# Altium PCB PCB2_1.PcbDoc
Units mil, origin at the board's own origin, x right, y up, seen from the top; angles counter-clockwise.
Board outline 4040 x 3695 mil, 2 copper layers (Top Layer, Bottom Layer); 60 components, 0 nets, 240 pads, 2 vias.
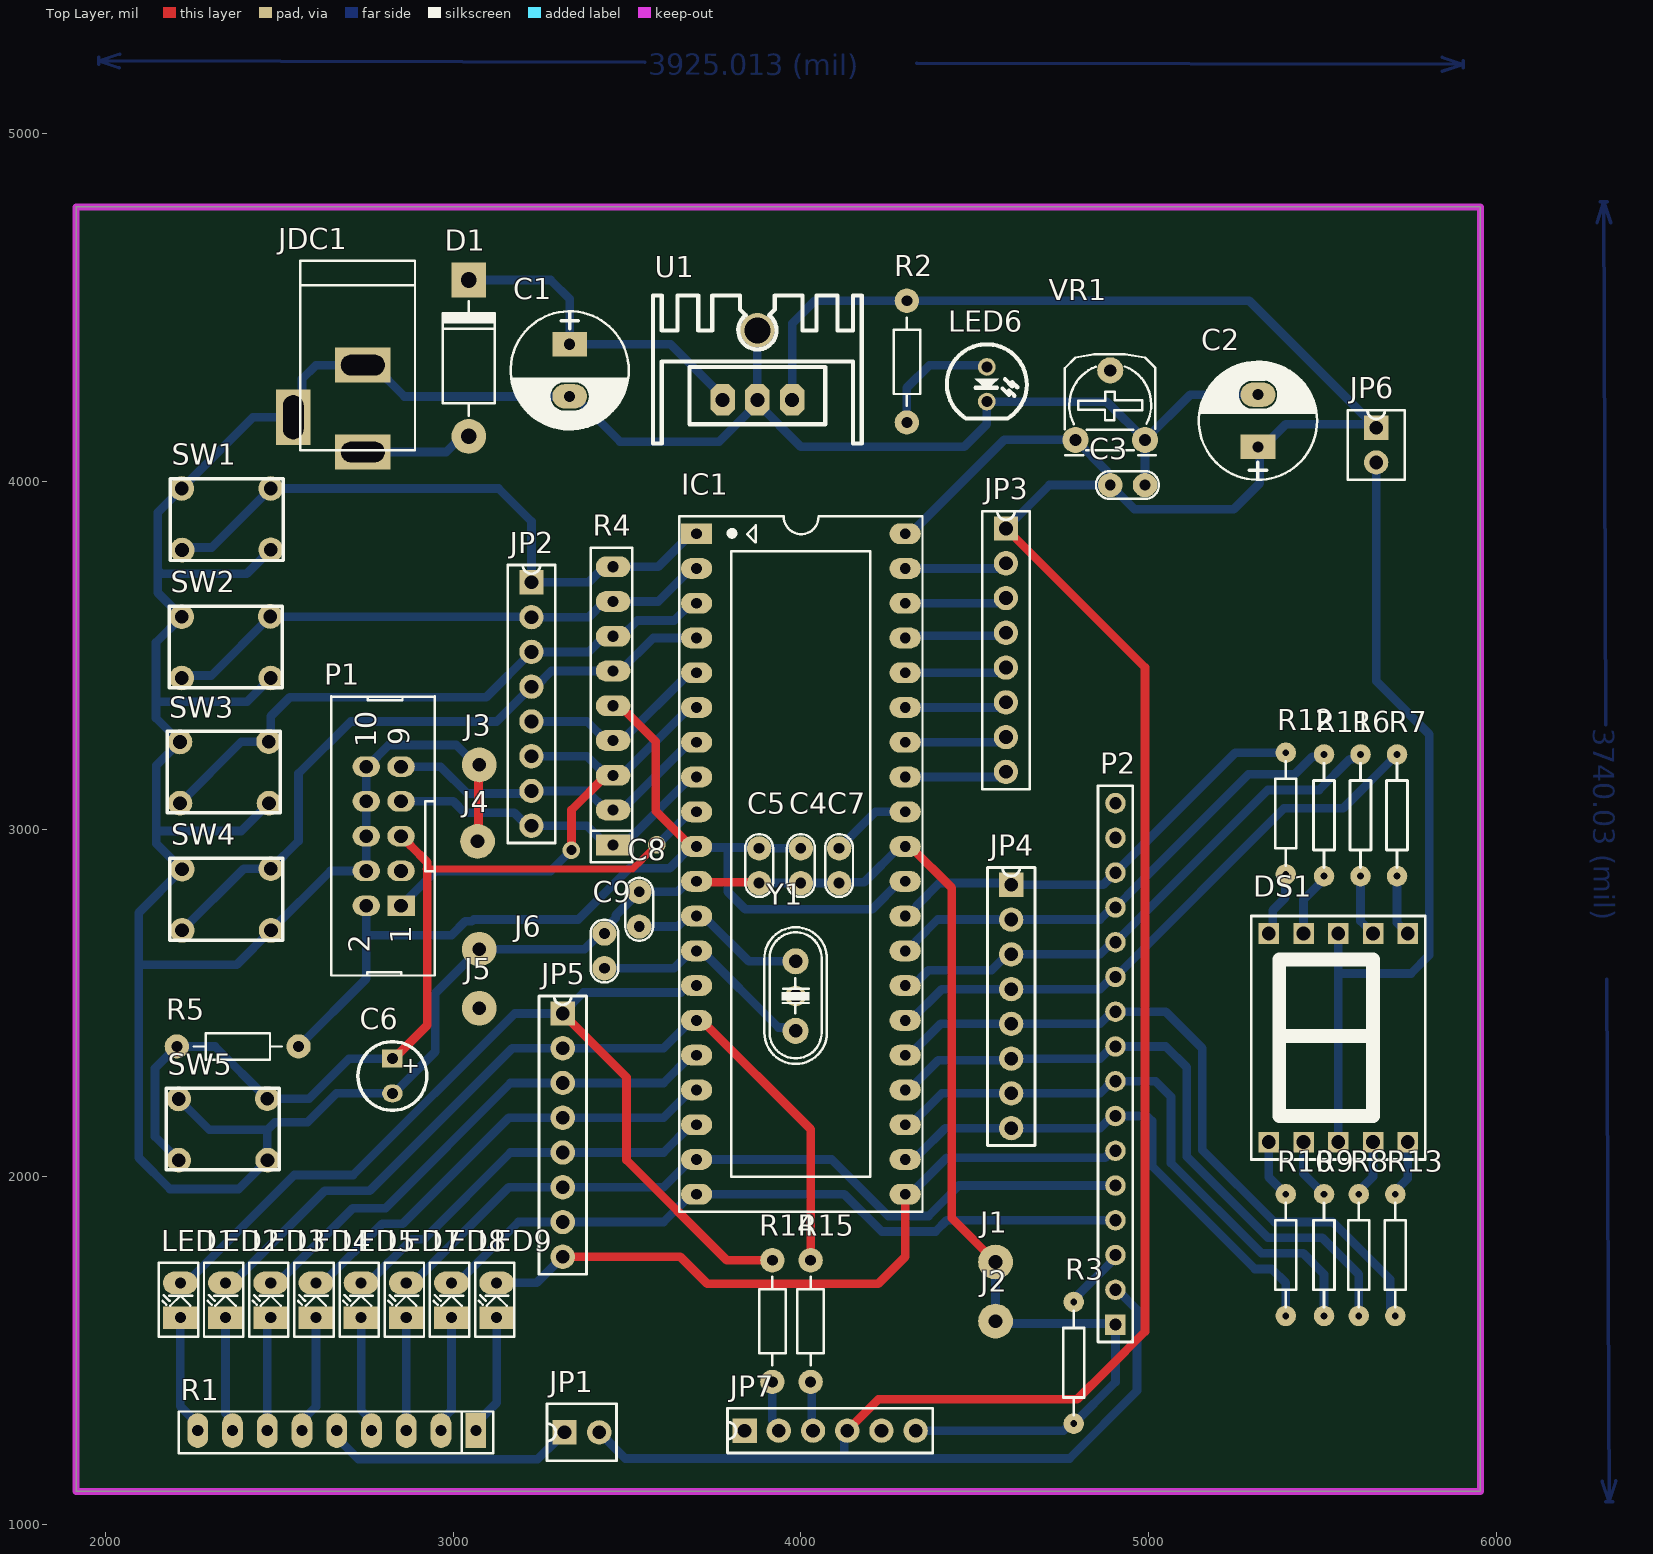
[diagram p0: Top Layer view]
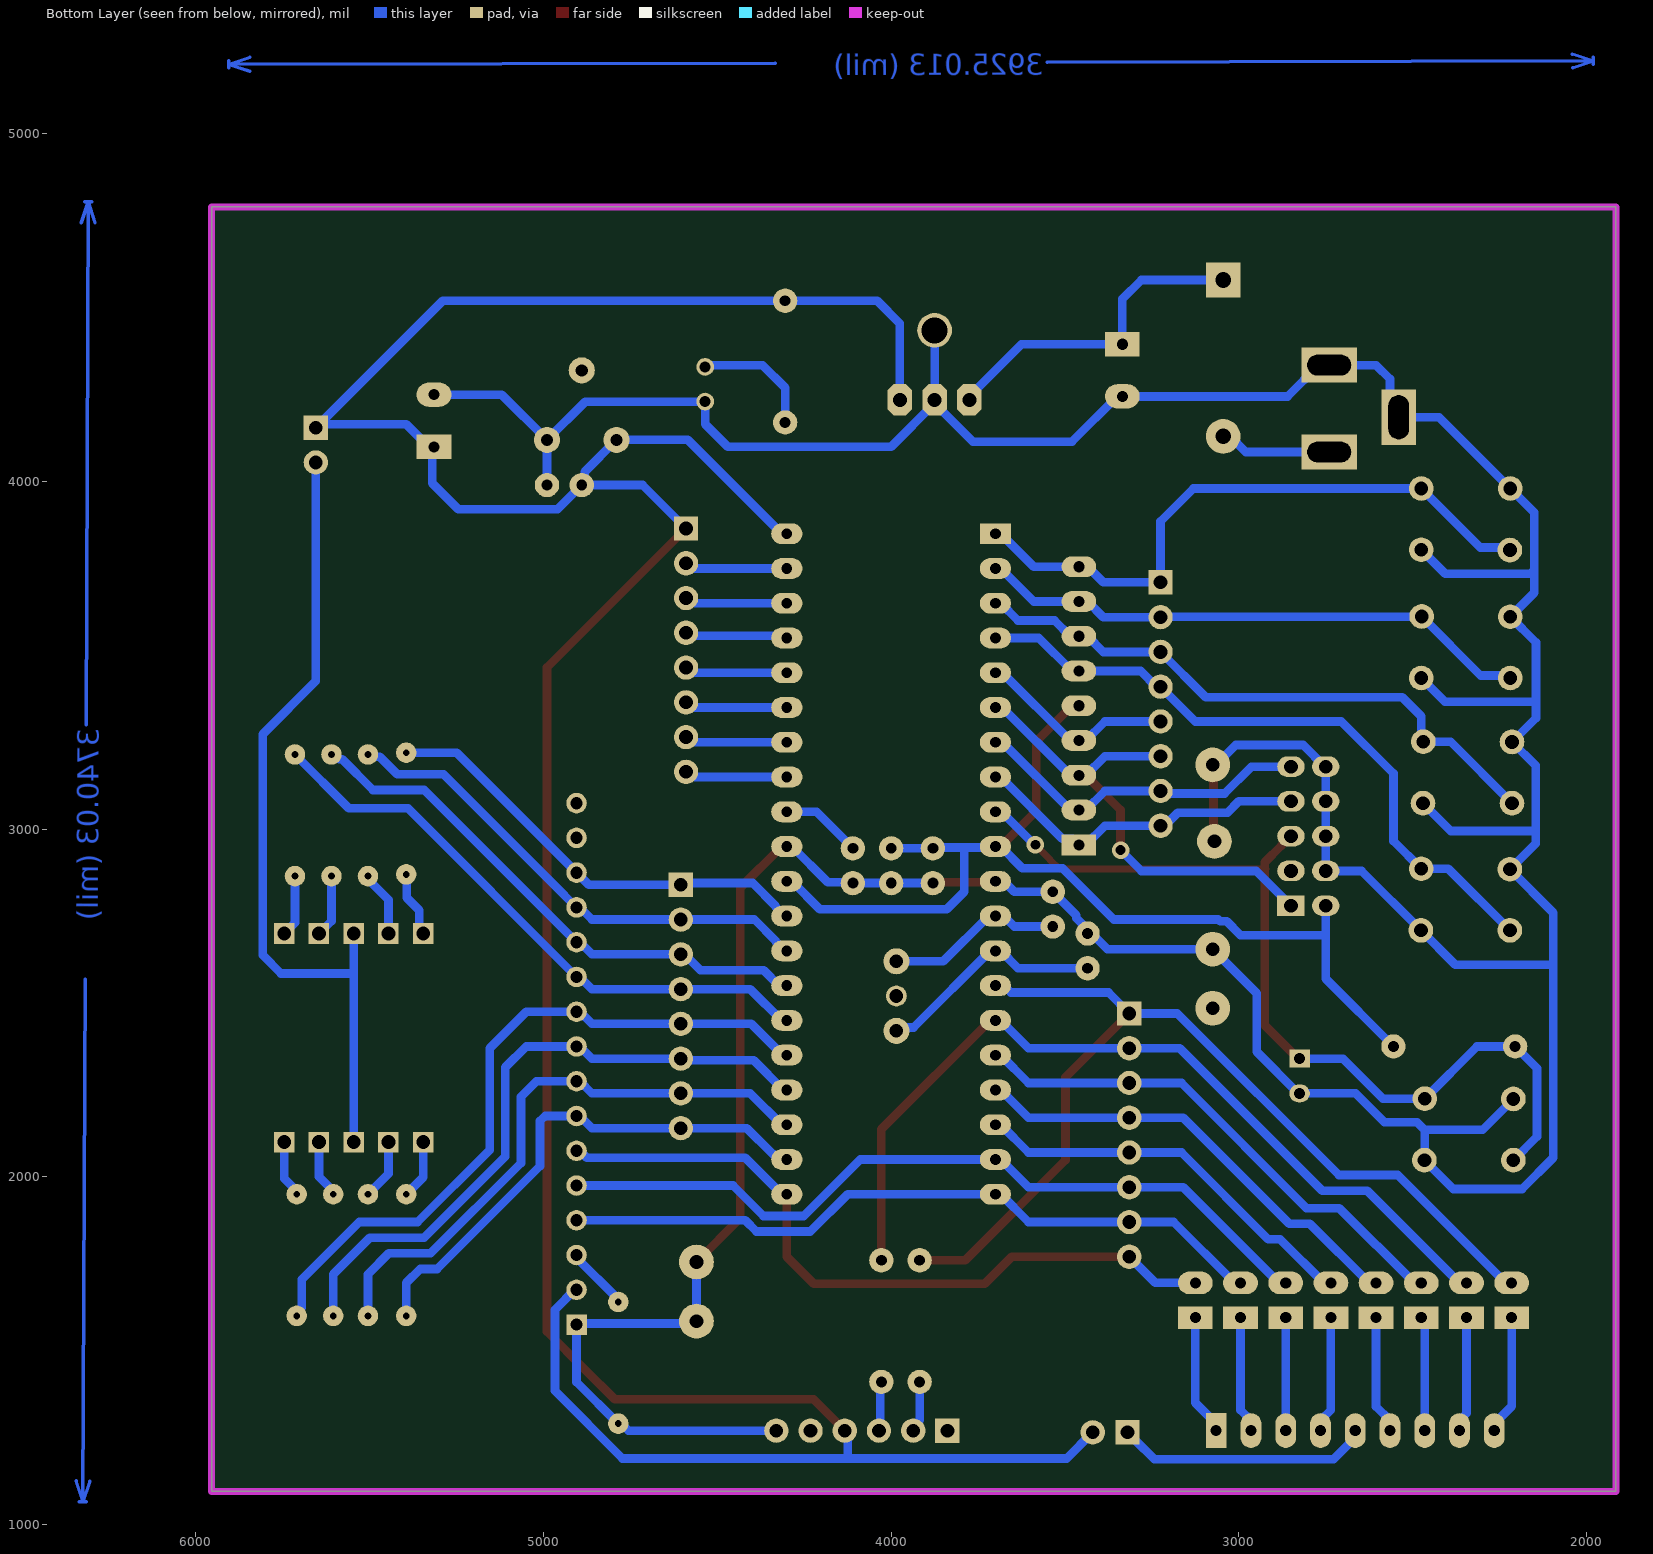
[diagram p1: Bottom Layer view, seen from below]

## Layer stack, top to bottom
Top Solder: solder mask 0.4, Solder Resist, Dk 3.5
Top Layer: signal copper 1.4
Dielectric 1: dielectric 12.6, FR-4, Dk 4.8
Bottom Layer: signal copper 1.4
Bottom Solder: solder mask 0.4, Solder Resist, Dk 3.5

## Board outline
1915,1095 5955,1095 5955,4790 1915,4790

## Design rules (kind name [scope] priority, off if disabled: settings)
Clearance [All] p1: gap=10 ignorepadtopadclearanceinfootprint=FALSE except(0: Arc-Hole Track-Hole SMDPad-Hole THPad-Hole Via-Hole Fill-Hole Poly-Hole Region-Hole Text-Hole)
PolygonConnect [All] p1: connectstyle=Relief reliefconductorwidth=10 reliefentries=4 polygonreliefangle="90 Angle" airgapwidth=10
RoutingVias [All] p1: holewidth=28 width=50 viastyle="Through Hole" minholewidth=28 minwidth=50 maxholewidth=28 maxwidth=50
SolderMaskExpansion [All] p1: expansion=4 istentingtop=FALSE
Width [All] p1: maxlimit=10 minlimit=10 preferedwidth=10
30 further rules are at their usual default settings.

## Components (designator, comment, footprint, x,y, rotation, side; value= is the part's Value field where it differs from the comment)
C1 "1000uF/16V" CP1.5/3.4 3335,4395 r270 top
C2 "1000uF/16V" CP1.5/3.4 5315,4100 r90 top
C3 "100pF" CN1 4990,3990 r180 top
C4 "100nF" CN1 4000,2845 r90 top value=100pF
C5 "100nF" CN1 3880,2845 r90 top value=100pF
C6 "10uF" C5mm 2825,2290 r270 top
C7 "100nF" CN1 4110,2845 r90 top value=100pF
C8 "22pF" CN1 3535,2820 r270 top value=100pF
C9 "22pF" CN1 3435,2700 r270 top value=100pF
D1 "1N4007" D2A 3045,4580 r270 top
DS1 "7SEG-A" LED7SEG 5545,2400 r0 top
IC1 "ATMEL 16L" DIP40/W0.6 3700,3850 r270 top value="Atmega 16L"
J1 "Hole" JP1 4560,1755 r90 top
J2 "Hole" JP1 4560,1585 r90 top
J3 "Hole" JP1 3075,3185 r90 top
J4 "Hole" JP1 3070,2965 r90 top
J5 "Hunget" JP1 3075,2485 r270 top
J6 "Heatsink Hole" JP1 3075,2655 r270 top
JDC1 "Jac DC" DC-IN 2640,4210 r270 top
JP1 "JP2" CON2 3320,1265 r90 top value="Connector 2"
JP2 "JP8" CON8 3225,3710 r0 top value="Connector 8"
JP3 "JP8" CON8 4590,3865 r0 top value="Connector 8"
JP4 "JP8" CON8 4605,2840 r0 top value="Connector 8"
JP5 "JP8" CON8 3315,2470 r0 top value="Connector 8"
JP6 "JP2" CON2 5655,4155 r0 top value="Connector 2"
JP7 "JP6" CON6 3838.15,1270 r90 top value="Connector 6"
LED1 "LED" LED-V 2215,1595 r90 top value="LED 3 ly Single Colour"
LED2 "LED" LED-V 2345,1595 r90 top value="LED 3 ly Single Colour"
LED3 "LED" LED-V 2475,1595 r90 top value="LED 3 ly Single Colour"
LED4 "LED" LED-V 2605,1595 r90 top value="LED 3 ly Single Colour"
LED5 "LED" LED-V 2735,1595 r90 top value="LED 3 ly Single Colour"
LED6 "LED_G_5" LED5G 4535,4330 r270 top value=Green
LED7 "LED" LED-V 2865,1595 r90 top value="LED 3 ly Single Colour"
LED8 "LED" LED-V 2995,1595 r90 top value="LED 3 ly Single Colour"
LED9 "LED" LED-V 3125,1595 r90 top value="LED 3 ly Single Colour"
P1 "SPI" IDE_2X5 2850,2780 r90 top value="Header 5x2"
P2 "Header 16" HDR1X16 4905,1575 r90 top
R1 "1K" RN8 3065,1270 r180 top value=10K
R2 "1k" R1/4W 4305,4520 r270 top value="R1/4W - 1K"
R3 "1k" R1/6W 4785,1465 r90 top value="R1/4W - 1K"
R4 "10K" RN8 3460,2955 r90 top
R5 "10k" R1/4W 2205,2375 r0 top value="R1/4W - 1K"
R6 "1k" R1/6W 5610,3040 r270 top value="R1/4W - 1K"
R7 "1k" R1/6W 5715,3040 r270 top value="R1/4W - 1K"
R8 "1k" R1/6W 5605,1775 r90 top value="R1/4W - 1K"
R9 "1k" R1/6W 5505,1775 r90 top value="R1/4W - 1K"
R10 "1k" R1/6W 5395,1775 r90 top value="R1/4W - 1K"
R11 "1k" R1/6W 5505,3040 r270 top value="R1/4W - 1K"
R12 "1k" R1/6W 5395,3045 r270 top value="R1/4W - 1K"
R13 "1k" R1/6W 5710,1775 r90 top value="R1/4W - 1K"
R14 "100R" R1/4W 3918.15,1760 r270 top value="R1/4W - 1K"
R15 "100R" R1/4W 4028.15,1760 r270 top value="R1/4W - 1K"
SW1 "SW" SW-4P-S 2475,3804 r180 top value="Button chip 4 pin"
SW2 "SW" SW-4P-S 2219,3611 r0 top value="Button chip 4 pin"
SW3 "SW" SW-4P-S 2214,3251 r0 top value="Button chip 4 pin"
SW4 "SW" SW-4P-S 2220,2885 r0 top value="Button chip 4 pin"
SW5 "SW" SW-4P-S 2210,2224 r0 top value="Button chip 4 pin"
U1 "LM7805" QTO-220H3 3775,4235 r0 top
VR1 "10K" VR 4790,4120 r0 top value="VR 10K"
Y1 "8MHz" XT2 3985,2520 r270 top

## Footprints (in the part's own frame and the unit in brackets; to place one, negate y for a bottom-side part, rotate by r counter-clockwise, add the part's x,y. Pads: shape width x height; smd on the part's side, far side on the other; paste and mask are expansions set on the pad)
C5mm [mm]
  rect 1.3x1.5 hole 0.8: 1(-1.27,0)
  oval 1.3x1.5 hole 0.8: 2(1.27,0)
  silkscreen extent -2.51,-2.51 2.51,2.51, body extent -2.5,-2.5 2.49,2.5, height 11.01
CN1 [mil]
  round 70 hole 31: 1(0,0) 2(100,0)
  silkscreen extent -40,-40 141,40, body extent -60,-30 170,37, height 265
CON2 [mil]
  rect 70x70 hole 39.37 unplated: 1(0,0)
  round 70 hole 39.37 unplated: 2(0,-100)
  silkscreen extent -82,-150 82,50
CON6 [mil]
  rect 70x70 hole 39.37 unplated: 1(0,0)
  round 70 hole 39.37 unplated: 2(0,-98.43) 3(0,-196.85) 4(0,-295.28) 5(0,-393.7) 6(0,-492.13)
  silkscreen extent -64,-541 64,49
CON8 [mil]
  rect 70x70 hole 39.37 unplated: 1(0,0)
  round 70 hole 39.37 unplated: 2(0,-100) 3(0,-200) 4(0,-300) 5(0,-400) 6(0,-500) 7(0,-600) 8(0,-700)
  silkscreen extent -68,-750 68,50
CP1.5/3.4 [mil] "Tu hoa 220->470uF,16V, 470uF/16V,25V"
  rect 70x100 hole 32: 1(0,0)
  oval 70x100 hole 32: 2(150,0)
  silkscreen extent -95,-170 245,170, body extent -85,-157 230,157, height 446
D2A [mil] "Diode 2A, W 150mil, L 450mil"
  round 100 hole 45: 1(450,0)
  rect 100x100 hole 45: 2(0,0)
  silkscreen extent 61,-75 391,75, body extent 5,-47 435,54, height 100
DC-IN [mil] "Jac DC input"
  rect 100x160 hole 59.06 slot 125.98 at 90 deg: 1(125,100) 2(-125,100)
  rect 160x100 hole 59.06 slot 125.98 at 0 deg: 3(25,-100)
  silkscreen extent -425,-80 120,250, body extent -410,-105 134,269, height 434
DIP40/W0.6 [mil] "40 PIN, W 600mil, Pin to pin 100mil"
  rect 60x90 hole 31: 1(0,0)
  oval 60x90 hole 31: 2(100,0) 3(200,0) 4(300,0) 5(400,0) 6(500,0) 7(600,0) 8(700,0) 9(800,0) 10(900,0) 11(1000,0) 12(1100,0) 13(1200,0) 14(1300,0) 15(1400,0) 16(1500,0) 17(1600,0) 18(1700,0) 19(1800,0) 20(1900,0) 21(1900,600) 22(1800,600) 23(1700,600) 24(1600,600) 25(1500,600) 26(1400,600) 27(1300,600) 28(1200,600) 29(1100,600) 30(1000,600) 31(900,600) 32(800,600) 33(700,600) 34(600,600) 35(500,600) 36(400,600) 37(300,600) 38(200,600) 39(100,600) 40(0,600)
  silkscreen extent -50,-50 1950,650, body extent -82,-10 1982,600, height 224
HDR1X16 [mm] "Connector; Header; 16 Position"
  rect 1.5x1.5 hole 0.9: 1(0,0)
  round 1.5 hole 0.9: 2(2.54,0) 3(5.08,0) 4(7.62,0) 5(10.16,0) 6(12.7,0) 7(15.24,0) 8(17.78,0) 9(20.32,0) 10(22.86,0) 11(25.4,0) 12(27.94,0) 13(30.48,0) 14(33.02,0) 15(35.56,0) 16(38.1,0)
  silkscreen extent -1.27,-1.27 39.37,1.27, body extent -1.27,-1.27 39.37,1.27, height 7
IDE_2X5 [mm] "Header 10x2,20 pin, connecter"
  rect 1.5x2 hole 1: 1(0,0)
  oval 1.5x2 hole 1: 2(0,2.54) 3(2.54,0) 4(2.54,2.54) 5(5.08,0) 6(5.08,2.54) 7(7.62,0) 8(7.62,2.54) 9(10.16,0) 10(10.16,2.54)
  silkscreen extent -5.1,-2.47 15.29,5.11, body extent -5.07,-2.98 15.23,5.87, height 9.17
JP1 [mm]
  round 2.54 hole 1: 1(0,0)
LED5G [mm] "LED, GREEN, 2 LEAD, 5mm"
  round 1.3 hole 0.8: 1(0,0) 2(2.54,0)
  silkscreen extent -1.65,-2.92 3.77,2.92, body extent -1.71,-3.01 3.71,3.01, height 12.31
LED7SEG [mm] "LED7SEG"
  round 1.524 on Top Overlay: 0(4.724,-5.334)
  rect 1.5x1.5 hole 1: 1(-5.055,-7.62) 2(-2.515,-7.62) 3(0.025,-7.62) 4(2.565,-7.62) 5(5.105,-7.62) 6(5.105,7.62) 7(2.565,7.62) 8(0.025,7.62) 9(-2.515,7.62) 10(-5.055,7.62)
  silkscreen extent -6.32,-8.89 6.38,8.89, body extent -6.35,-9.52 6.35,9.53, height 8.03
LED-V [mil] "LED 2 PIN, Rectang Only colour"
  rect 65x100 hole 32: 1(0,0)
  oval 65x100 hole 32: 2(100,0)
  silkscreen extent -55,-51 158,62
QTO-220H3 [mil] "TO-220 1-2-3"
  oct 70x90 hole 40: 1(0,0) 2(100,0) 3(200,0)
  round 100 hole 75: 2(100,200)
  silkscreen extent -200,-125 400,300, body extent -194,-102 388,323, height 984
R1/4W [mil] "R 1/4W, 2 Pin, 350mil"
  round 70 hole 31: 1(0,0) 2(350,0)
  silkscreen extent 48,-38 302,38, body extent -40,-47 386,47, height 111
R1/6W [mm]
  round 1.5 hole 0.5: 1(-4.445,0) 2(4.445,0)
  silkscreen extent -3.81,-0.76 3.81,0.76
RN8 [mil] "R SIP8, 9 Pin"
  rect 60x100 hole 32: 1(0,0)
  oval 60x100 hole 32: 2(100,0) 3(200,0) 4(300,0) 5(400,0) 6(500,0) 7(600,0) 8(700,0) 9(800,0)
  silkscreen extent -50,-55 855,65, body extent -43,-44 843,5, height 259
SW-4P-S [mm]
  round 1.8 hole 1: 1(0,0) 2(0,-4.47) 3(6.502,-4.47) 4(6.477,0.025)
  silkscreen extent -0.91,-5.18 7.34,0.79, body extent -0.86,-5.23 7.35,0.76, height 9.52
VR [mil] "Resistor Variable"
  round 75 hole 35: 1(0,0) 2(100,200) 3(200,0)
  silkscreen extent -31,-44 231,246, body extent -87,-30 307,372, height 165
XT2 [mm] "Footpin for Crystal 2 pin"
  round 1.524 hole 1: 0(0,0)
  round 1.905 hole 1: 1(-2.54,0) 2(2.54,0)
  silkscreen extent -5.03,-2.29 4.96,2.29, body extent -5.93,-2.36 5.42,2.29, height 3.5

## Part data
C1 C2: library part CP4, "Cap 1000uF/16V - 220uF/50V", Description 1="2200uF-3300uF/6,3V - 1000uF-2200uF/10V", Description 2="1000uF/16V - 470uF => 1000uF/25V - 100uF/100V", Description 3=330uF>470uF/35V_220uF>470uF/50V_10uF>22uF/250V, Description 4="220uF => 330uF/63V - 10uF =>33uF/160 - 200V", Description 5="4,7uF>10uF/250V_3,3uF>10uF/400V - 2,2uF>4,7uF/450V"
C3 C4 C5 C7 C8 C9: library part CN1, "Cap np  1pF - 472pF"
C6: library part "Cap Pol 5mm", "Polarized Capacitor (Axial)", LatestRevisionDate=17-Jul-2002, LatestRevisionNote="Re-released for DXP Platform.", PackageReference=POLAR0.8, Published=8-Jun-2000, Publisher="Altium Limited"
D1: library part D1A, "Diode 1A"
DS1: library part LED7SEG-A, "14.2 mm General Purpose Blue 7-Segment Display: CA, RH DP, Gray Surface", Colour=Blue, PackageDocument=24-Sep-2002, ComponentLink1Description="Manufacturer Link", ComponentLink1URL=http://www.agilent.com/, DatasheetDocument=24-Sep-2002, LatestRevisionDate=17-Dec-2003, LatestRevisionNote="Schematic revised, PCB Footprint replaced.", MinimumIntensity="2020 ucd", Note="IF = 10 mA", PackageReference=H, Published=8-Jun-2000, Publisher="Altium Limited"
IC1: library part Atmega16L, "8-Bit AVR Microcontroller with 16K Bytes of In-System Programmable Flash Memory"
J1 J2 J3 J4 J5 J6: library part JP1, "JP1"
JDC1: library part DCIN, "Jac DC input"
JP1 JP6: library part Con2, "Connector 2"
JP2 JP3 JP4 JP5: library part Con8, "Connector 8"
JP7: library part Con6, "Connector 6"
LED1 LED2 LED3 LED4 LED5 LED7 LED8 LED9: "LED Single colour Green and Red"
LED6: library part LED_GREEN_5MM, "LED Green 5mm", ComponentLink1Description=Datasheet, ComponentLink1URL="D:\Dropbox\Datasheets\Opto and Illumination\LEDs\SMD LED.pdf", Unit Price=0.0476
P1: library part "IDE 5x2", "Header 5x2"
P2: "Header, 16-Pin", LatestRevisionDate=17-Jul-2002, LatestRevisionNote="Re-released for DXP Platform.", Publisher="Altium Limited"
R1 R4: library part RKC8LD, "Resistor Pack 4x2"
R2 R5 R14 R15: library part R1/4W, "Resistor 1/4W"
R3 R6 R7 R8 R9 R10 R11 R12 R13: library part Res, "Resistor 1/4W"
SW1 SW2 SW3 SW4 SW5: library part SW4, "Switch button 4 pin"
U1: "TO-220", Text Field1=70, Text Field2=30
VR1: library part VR1, "Var Resistor"
Y1: library part Crystal, "Crystal Oscillator", LatestRevisionDate=17-Jul-2002, LatestRevisionNote="Re-released for DXP Platform.", PackageReference=R38, Published=8-Jun-2000, Publisher="Altium Limited"

## Via types
v1: diameter 50, hole 28, Top Layer to Bottom Layer, 2 vias

## Nets (pads, with @x,y where several pads share a name; then routed paths per layer and width w, separated by ;. In a path a pad name is that pad's centre, name@x,y a point inside that pad or via, vN(x,y) a via of type N, cw(c..) or ccw(c..) an arc to the next point about the centre after c; other vN are vias at no path point)
pads on no net: C1.1 C1.2 C2.1 C2.2 C3.1 C3.2 C4.1 C4.2 C5.1 C5.2 C6.1 C6.2 C7.1 C7.2 C8.1 C8.2 C9.1 C9.2 D1.1 D1.2 DS1.0 DS1.1 DS1.2 DS1.3 DS1.4 DS1.5 DS1.6 DS1.7 DS1.8 DS1.9 DS1.10 IC1.1 IC1.2 IC1.3 IC1.4 IC1.5 IC1.6 IC1.7 IC1.8 IC1.9 IC1.10 IC1.11 IC1.12 IC1.13 IC1.14 IC1.15 IC1.16 IC1.17 IC1.18 IC1.19 IC1.20 IC1.21 IC1.22 IC1.23 IC1.24 IC1.25 IC1.26 IC1.27 IC1.28 IC1.29 IC1.30 IC1.31 IC1.32 IC1.33 IC1.34 IC1.35 IC1.36 IC1.37 IC1.38 IC1.39 IC1.40 J1.1 J2.1 J3.1 J4.1 J5.1 J6.1 JDC1.1 JDC1.2 JDC1.3 JP1.1 JP1.2 JP2.1 JP2.2 JP2.3 JP2.4 JP2.5 JP2.6 JP2.7 JP2.8 JP3.1 JP3.2 JP3.3 JP3.4 JP3.5 JP3.6 JP3.7 JP3.8 JP4.1 JP4.2 JP4.3 JP4.4 JP4.5 JP4.6 JP4.7 JP4.8 JP5.1 JP5.2 JP5.3 JP5.4 JP5.5 JP5.6 JP5.7 JP5.8 JP6.1 JP6.2 JP7.1 JP7.2 JP7.3 JP7.4 JP7.5 JP7.6 LED1.1 LED1.2 LED2.1 LED2.2 LED3.1 LED3.2 LED4.1 LED4.2 LED5.1 LED5.2 LED6.1 LED6.2 LED7.1 LED7.2 LED8.1 LED8.2 LED9.1 LED9.2 P1.1 P1.2 P1.3 P1.4 P1.5 P1.6 P1.7 P1.8 P1.9 P1.10 P2.1 P2.2 P2.3 P2.4 P2.5 P2.6 P2.7 P2.8 P2.9 P2.10 P2.11 P2.12 P2.13 P2.14 P2.15 P2.16 R1.1 R1.2 R1.3 R1.4 R1.5 R1.6 R1.7 R1.8 R1.9 R2.1 R2.2 R3.1 R3.2 R4.1 R4.2 R4.3 R4.4 R4.5 R4.6 R4.7 R4.8 R4.9 R5.1 R5.2 R6.1 R6.2 R7.1 R7.2 R8.1 R8.2 R9.1 R9.2 R10.1 R10.2 R11.1 R11.2 R12.1 R12.2 R13.1 R13.2 R14.1 R14.2 R15.1 R15.2 SW1.1 SW1.2 SW1.3 SW1.4 SW2.1 SW2.2 SW2.3 SW2.4 SW3.1 SW3.2 SW3.3 SW3.4 SW4.1 SW4.2 SW4.3 SW4.4 SW5.1 SW5.2 SW5.3 SW5.4 U1.1 U1.2 U1.3 VR1.1 VR1.2 VR1.3 Y1.0 Y1.1 Y1.2
copper on no net: | length 89729.3
  Top Layer w20: 2921.87,2885 3515.96,2885 3542.5,2911.54 3542.5,2912.5 v1(3585,2955)
  Top Layer w25: 2825,2340 2828.94,2340 2925,2436.06 2925,2905 2876.87,2953.13 2876.87,2953.76 2850.63,2980 2850,2980 ; 3070,2965 3072.5,2967.5 3072.5,3182.5 3075,3185 ; 3315,1770 3652.89,1770 3730.39,1692.5 4222.5,1692.5 4300,1770 4300,1950 ; 3315,2470 3498.31,2286.69 3498.31,2048.31 3786.61,1760 3918.15,1760 ; v1(3340,2940) 3340,3055 3440,3155 3460,3155 ; 3460,3355 3480,3355 3582.5,3252.5 3582.5,3052.5 3685,2950 3700,2950 ; 3700,2450 3715,2450 4028.15,2136.85 4028.15,1760 ; 3700,2850 3702.5,2847.5 3877.5,2847.5 3880,2845 ; 4133.43,1270 4223.43,1360 4795,1360 4881.01,1446.01 4990,1554.98 4990,3465 4590,3865 ; 4300,2950 4315,2950 4433.67,2831.33 4433.67,1881.33 4560,1755
  Bottom Layer w10: 1979.97,5200 1980.03,5220 ; 2039.95,5189.85 1980,5210 ; 2040.05,5229.85 1980,5210 ; 3551.62,5206 1980,5210 ; 4333.38,5204 5905,5200 ; 5844.95,5180.15 5905,5200 ; 5845.05,5220.15 5905,5200 ; 5904.97,5190 5905.03,5210 ; 6290.24,4744.92 6310,4805 ; 6300,4804.96 6320,4805.04 ; 6304.76,1124.92 6325,1065 ; 6315,1064.96 6335,1065.04 ; 6316.03,3300.88 6310,4805 ; 6318.97,2569.12 6325,1065 ; 6330.24,4745.08 6310,4805 ; 6344.76,1125.08 6325,1065
  Bottom Layer w25: 2210,2048 2142.07,2115.93 2142.07,2312.07 2205,2375 2315,2375 2465,2225 2585.19,2225 2700.19,2340 2825,2340 ; 2210,2224 2299,2135 2465,2135 ; 2214,3075 2391,3252 2469,3252 2474.93,3257.93 2474.93,3324.93 2530,3380 3095,3380 3225,3510 3389.54,3510 3434.54,3555 3485.19,3555 3530.33,3600.13 3635.13,3600.13 3685,3650 3700,3650 ; 2215,1595 2215,1340 2265,1290 2265,1270 ; 2215,1695 2232.5,1695 2542.5,2005 2711.67,2005 3176.67,2470 3315,2470 3375,2530 3655.53,2530 3675.53,2550 3700,2550 ; 2219,3435 2226.34,3442.34 2304.34,3442.34 2474,3612 2475,3611 3224,3611 3225,3610 3389.54,3610 3434.54,3655 3460,3655 3590,3655 3685,3750 3700,3750 ; 2220,2709 2397,2886 2475,2886 2555,2966 2555,3160 2705,3310 3125,3310 3225,3410 3237.18,3410 3282.18,3455 3460,3455 3480,3455 3575,3550 3700,3550 ; 2220,3803 2227.34,3810.34 2305.34,3810.34 2475,3980 3130,3980 3225,3885 3225,3710 3389.54,3710 3434.54,3755 3460,3755 3590,3755 3685,3850 3700,3850 ; 2345,1595 2345,1319.47 2365,1299.47 2365,1270 ; 2345,1695 2365.58,1695 2630.58,1960 2760,1960 3170,2370 3315,2370 3605,2370 3685,2450 3700,2450 ; 2465,1270 2465,1585 2475,1595 ; 2470,3075 2390,2995 2146.07,2995 ; 2475,1695 2495.58,1695 2710.58,1910 2805,1910 3165,2270 3315,2270 3605,2270 3685,2350 3700,2350 ; 2475,3435 2407.07,3367.07 2152.93,3367.07 2145,3375 ; 2475,3804 2406.07,3735.07 2159.93,3735.07 2150,3745 ; 2555,2375 2750,2570 2750,2695 ; 2565,1270 2565,1299.47 2605,1339.47 2605,1595 ; 2605,1695 2625.58,1695 2795.58,1865 2855,1865 3160,2170 3315,2170 3605,2170 3685,2250 3700,2250 ; 2665,1270 2665,1250 2727.5,1187.5 3242.5,1187.5 3297.5,1242.5 3320,1265 ; 2735,1595 2735,1329.47 2765,1299.47 2765,1270 ; 2735,1695 2755.58,1695 2880.58,1820 2915,1820 3165,2070 3315,2070 3605,2070 3685,2150 3700,2150 ; 2740,4085 2979.71,4085 3024.71,4130 3045,4130 ; 2750,2780 2750,2695 ; 2850,2780 2950,2880 3280,2880 v1(3340,2940) ; 2850,3080 2999.69,3080 3032.19,3047.5 3175.32,3047.5 3212.82,3010 3225,3010 3385,3010 3440,2955 3460,2955 3477.5,2972.5 3507.5,2972.5 3685,3150 3700,3150 ; 2850,3180 2963.33,3180 3040.83,3102.5 3217.5,3102.5 3225,3110 3385,3110 3440,3055 3460,3055 3485,3055 3680,3250 3700,3250 ; 2865,1270 2865,1595 ; 2865,1695 2885,1695 3160,1970 3315,1970 3605,1970 3685,2050 3700,2050 4088.64,2050 4251.14,1887.5 4367.5,1887.5 4455,1975 4905,1975 ; 2965,1270 2965,1299.47 2995,1329.47 2995,1595 ; 2995,1695 3012.5,1695 3187.5,1870 3605,1870 3685,1950 3700,1950 4125,1950 4232.5,1842.5 4387.5,1842.5 4420,1875 4905,1875 ; 3045,4580 3280,4580 3335,4525 3335,4395 3625,4395 3775,4245 3775,4235 ; 3065,1270 3065,1290 3125,1350 3125,1595 ; 3075,3185 3065.31,3185 3008.28,3242.03 2814.46,3242.03 2752.44,3180 2750,3180 2750,3080 2750,2980 2750,2880 2647,2880 2476,2709 2377,2610 2095,2610 ; 3125,1695 3240,1695 3315,1770 ; 3225,3210 3385,3210 3440,3155 3460,3155 3485,3155 3680,3350 3700,3350 ; 3225,3310 3385,3310 3440,3255 3460,3255 3485,3255 3680,3450 3700,3450 ; 3420,1265 3495,1190 4125,1190 ; 3435,2600 3635,2600 3685,2650 3700,2650 3715,2650 3935.43,2429.57 3975.43,2429.57 3985,2420 ; 3535,2720 3645.53,2720 3675.53,2750 3700,2750 3720,2750 3850,2620 3985,2620 ; v1(3585,2955) 3587.5,2955 3682.5,3050 3700,3050 ; 3700,2850 3675.53,2850 3645.53,2820 3535,2820 3467.5,2752.5 3467.5,2744.68 3435,2712.18 3435,2700 3422.82,2700 3377.82,2655 3075,2655 2948.35,2528.35 2948.35,2359.42 2828.94,2240 2663.83,2240 2580.9,2157.07 2487.07,2157.07 2465,2135 ; 3875,4435 3875,4235 3875,4225 ; 3880,2845 4000,2845 4110,2845 4112.5,2847.5 4182.5,2847.5 4285,2950 4300,2950 ; 3918.15,1410 3918.15,1300.6 3936.57,1282.18 3936.57,1270 ; 3975,4235 3975,4455 4040,4520 4305,4520 5290,4520 5645,4165 ; 4000,2945 3880,2945 3877.5,2947.5 3790,2947.5 ; 4028.15,1410 4031.57,1406.57 4031.57,1273.43 4035,1270 ; 4110,2945 4215,3050 4300,3050 ; 4133.43,1270 4125,1261.57 4125,1190 ; 4300,1950 4315,1950 4420,2055 4875.78,2055 4895.78,2075 4905,2075 ; 4300,2050 4324.47,2050 4341.97,2067.5 4342.5,2067.5 4415,2140 4605,2140 4860.78,2140 4895.78,2175 4995.36,2175 5010,2160.36 5010,2031.36 5306.36,1735 5355,1735 5395,1695 5395,1600 ; 4300,2150 4315,2150 4405,2240 4860.78,2240 4895.78,2275 ; 4300,2250 4310,2250 4395,2335 4600,2335 4605,2340 4860.78,2340 4895.78,2375 4905,2375 5050,2375 5110,2315 5110,2058.64 5343.64,1825 5500,1825 5605,1720 5605,1600 ; 4300,2350 4312.14,2350 4402.14,2440 4860.78,2440 4895.78,2475 4905,2475 5050,2475 5155,2370 5155,2077.28 5362.28,1870 5530,1870 5695.1,1704.9 5695.1,1624.11 5710,1609.22 5710,1600 ; 4300,2450 4315,2450 4405,2540 4605,2540 4860.78,2540 4895.78,2575 4905,2575 5390,3060 5560,3060 5715,3215 ; 4300,2550 4322.37,2550 4366.42,2594.04 4548.43,2594.04 4594.38,2640 4860.78,2640 4895.78,2675 ; 4300,2650 4305.53,2650 4331.92,2676.39 4331.92,2678.54 4393.39,2740 4860.78,2740 4895.78,2775 ; 4300,2750 4305.53,2750 4331.92,2776.39 4331.92,2778.54 4398.39,2845 4600,2845 4605,2840 4870,2840 5250,3220 5395,3220 ; 4300,2850 4285,2850 4205,2770 3840,2770 3790,2820 3790,2947.5 ; 4300,3150 4562.82,3150 4577.82,3165 4590,3165 ; 4300,3250 4562.82,3250 4577.82,3265 4590,3265 ; 4300,3350 4562.82,3350 4577.82,3365 4590,3365 ; 4300,3450 4562.82,3450 4577.82,3465 4590,3465 ; 4300,3550 4306.7,3556.7 4581.7,3556.7 4590,3565 ; 4300,3650 4562.82,3650 4577.82,3665 4590,3665 ; 4300,3750 4562.82,3750 4577.82,3765 4590,3765 ; 4300,3850 4315,3850 4585,4120 4790,4120 4881.39,4028.61 4881.39,3998.61 4890,3990 ; 4305,4170 4305,4270 4370,4335 4530,4335 4535,4330 ; 4330.28,1270 4755.78,1270 4775.78,1290 4785,1290 4905,1410 4905,1575 4902.03,1577.97 4567.03,1577.97 4560,1585 4560,1755 ; 4590,3865 4715,3990 4890,3990 ; 4785,1640 4785,1647.5 4905,1767.5 4905,1775 ; 4905,1675 4910.02,1675 4967.03,1617.99 4967.03,1384.31 4772.72,1190 4125,1190 ; 4905,2275 5020,2275 5065,2230 5065,2040 5325,1780 5445,1780 5505,1720 5505,1600 ; 4905,2675 4980,2750 5342.97,3112.97 5490.69,3112.97 5578.96,3201.24 5587.03,3201.24 5600.78,3215 5610,3215 ; 4905,2775 4970,2840 5287.97,3157.97 5420.69,3157.97 5471.2,3208.48 5498.48,3208.48 5505,3215 ; 4990,3990 4990,4120 ; 5315,4250 5120,4250 4990,4120 ; 5346,2100 5346,1999 5395,1950 ; 5346,2700 5357.14,2711.14 5357.14,2767.03 5393.08,2802.97 5393.08,2868.08 5395,2870 ; 5446,2100 5446,2009 5505,1950 ; 5446,2700 5446,2796.78 5505,2855.78 5505,2865 ; 5546,2100 5546,2585 ; 5546,2700 5546,2585 ; 5605,1950 5605,1959.22 5646,2000.22 5646,2100 ; 5610,2865 5610,2736 5646,2700 ; 5655,4055 5655,3426.43 5808.03,3273.4 5808.03,2638.03 5755,2585 5546,2585 ; 5655,4155 5645,4165 ; 5710,1950 5710,1959.22 5746,1995.22 5746,2100 ; 5715,2865 5715,2731 5746,2700 ; 2095,2610 2095,2055 2185,1965 2383,1965 2466,2048 2465,2049 2465,2135 ; 2095,2610 2095,2760 2220,2885 2146.07,2958.93 2146.07,2995 ; 2145,3375 2145,3320 2214,3251 2146.07,3183.07 2146.07,2995 ; 2145,3375 2145,3537 2219,3611 2150,3680 2150,3745 ; 2150,3745 2150,3911 2219,3980 2424,4185 2540,4185 2565,4210 2565,4295 2605,4335 2740,4335 2770,4335 2860,4245 3335,4245 3350,4245 3480,4115 3765,4115 3875,4225 ; 2750,2695 2995,2695 3035,2735 3053.64,2735 3058.64,2740 3359.54,2740 3507.04,2887.5 3622.5,2887.5 3685,2950 3700,2950 3702.5,2947.5 3790,2947.5 ; 3875,4225 4000,4100 4470,4100 4535,4165 4535,4230 4880,4230 4990,4120 ; 4890,3990 4960,3920 5245,3920 5320,3995 5320,4095 5315,4100 5330,4100 5395,4165 5645,4165

## Keep-outs
Keep-Out Layer:
  the board outline again, w20

## Other copper
Bottom Layer:
  text "3925.013 (mil)" at 3561.53,5169.98 h60 r359.85
  text "3740.03 (mil)" at 6280.08,3290.74 h60 r270.23

## Text inside footprints (layer, text, board x,y; h text height)
C6: Top Overlay "+" at 2858,2345 h47.24 r270
P1: Top Overlay "10" at 2779,3236 h60 r90; Top Overlay "9" at 2874,3241 h60 r90; Top Overlay "2" at 2760,2645 h60 r90; Top Overlay "1" at 2879.53,2670.75 h60 r90